# Altium PCB ChongTromSim808.PcbDoc
Units mm, origin at the board's own origin, x right, y up, seen from the top; angles counter-clockwise.
Board outline 152.4 x 101.6 mm, 2 copper layers (Top Layer, Bottom Layer); 29 components, 16 nets, 105 pads, 16 vias.
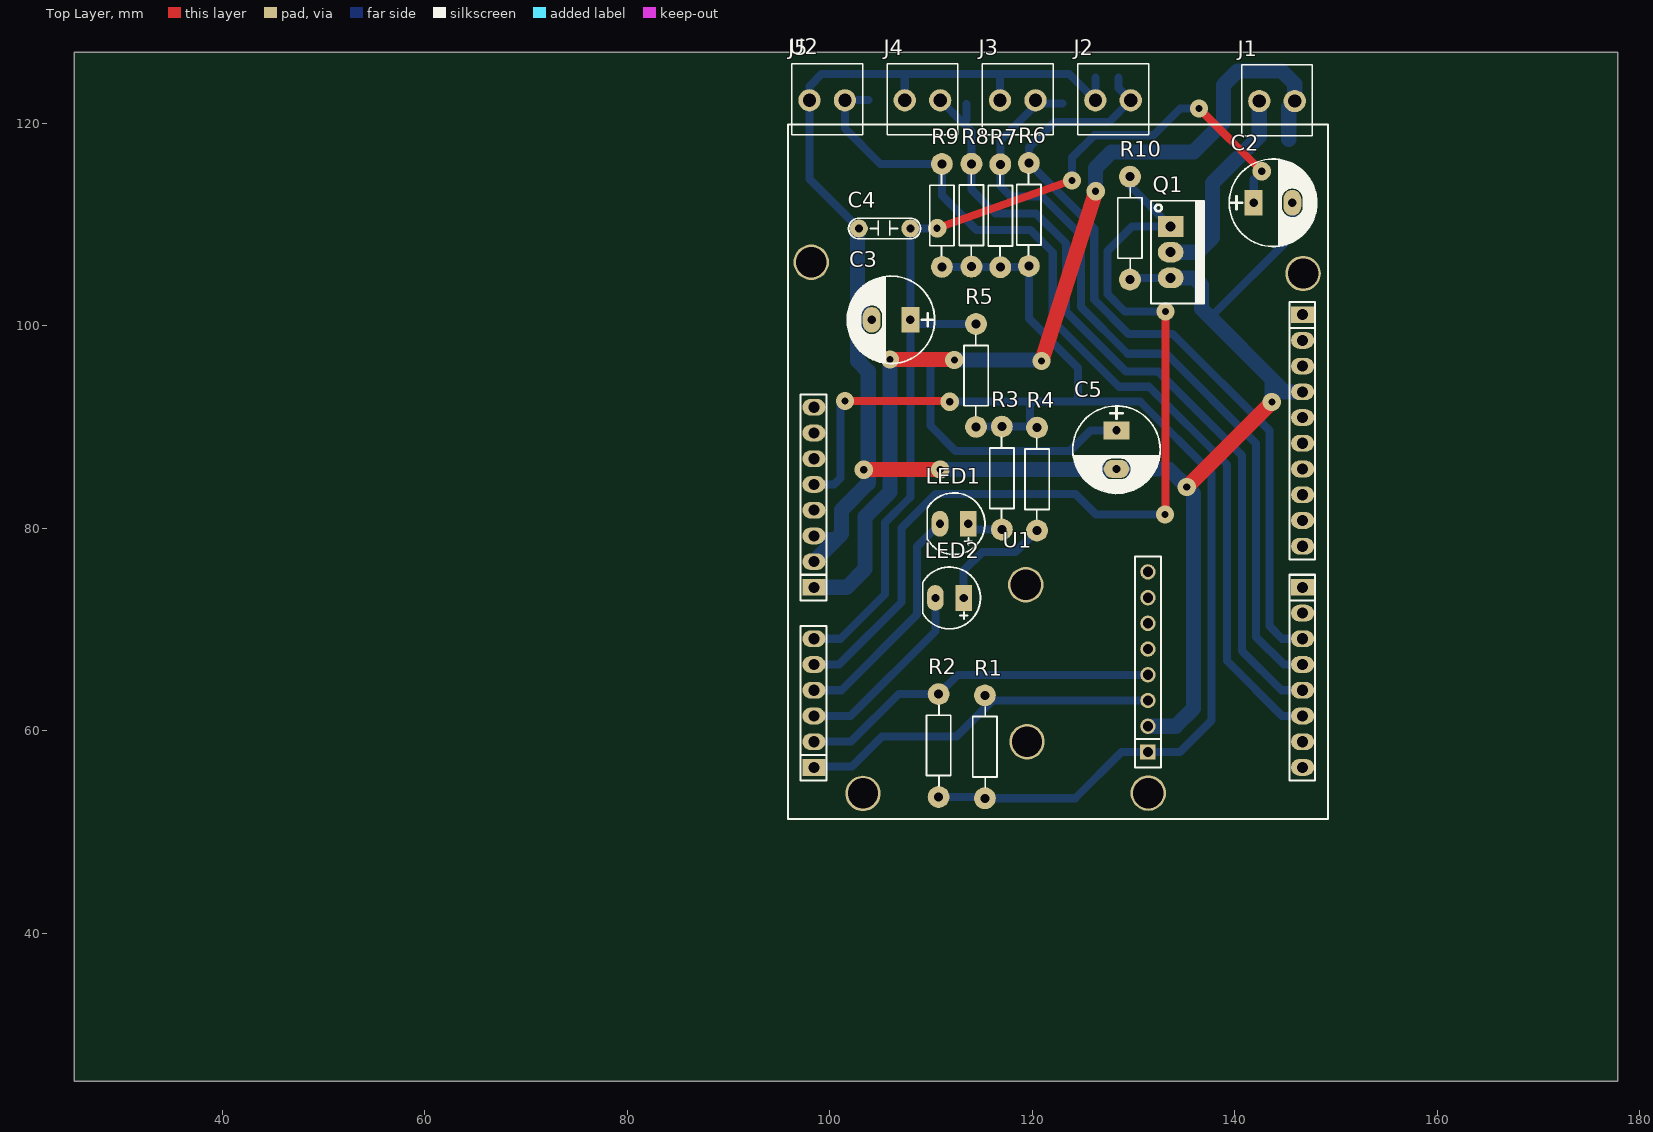
[diagram p0: Top Layer view]
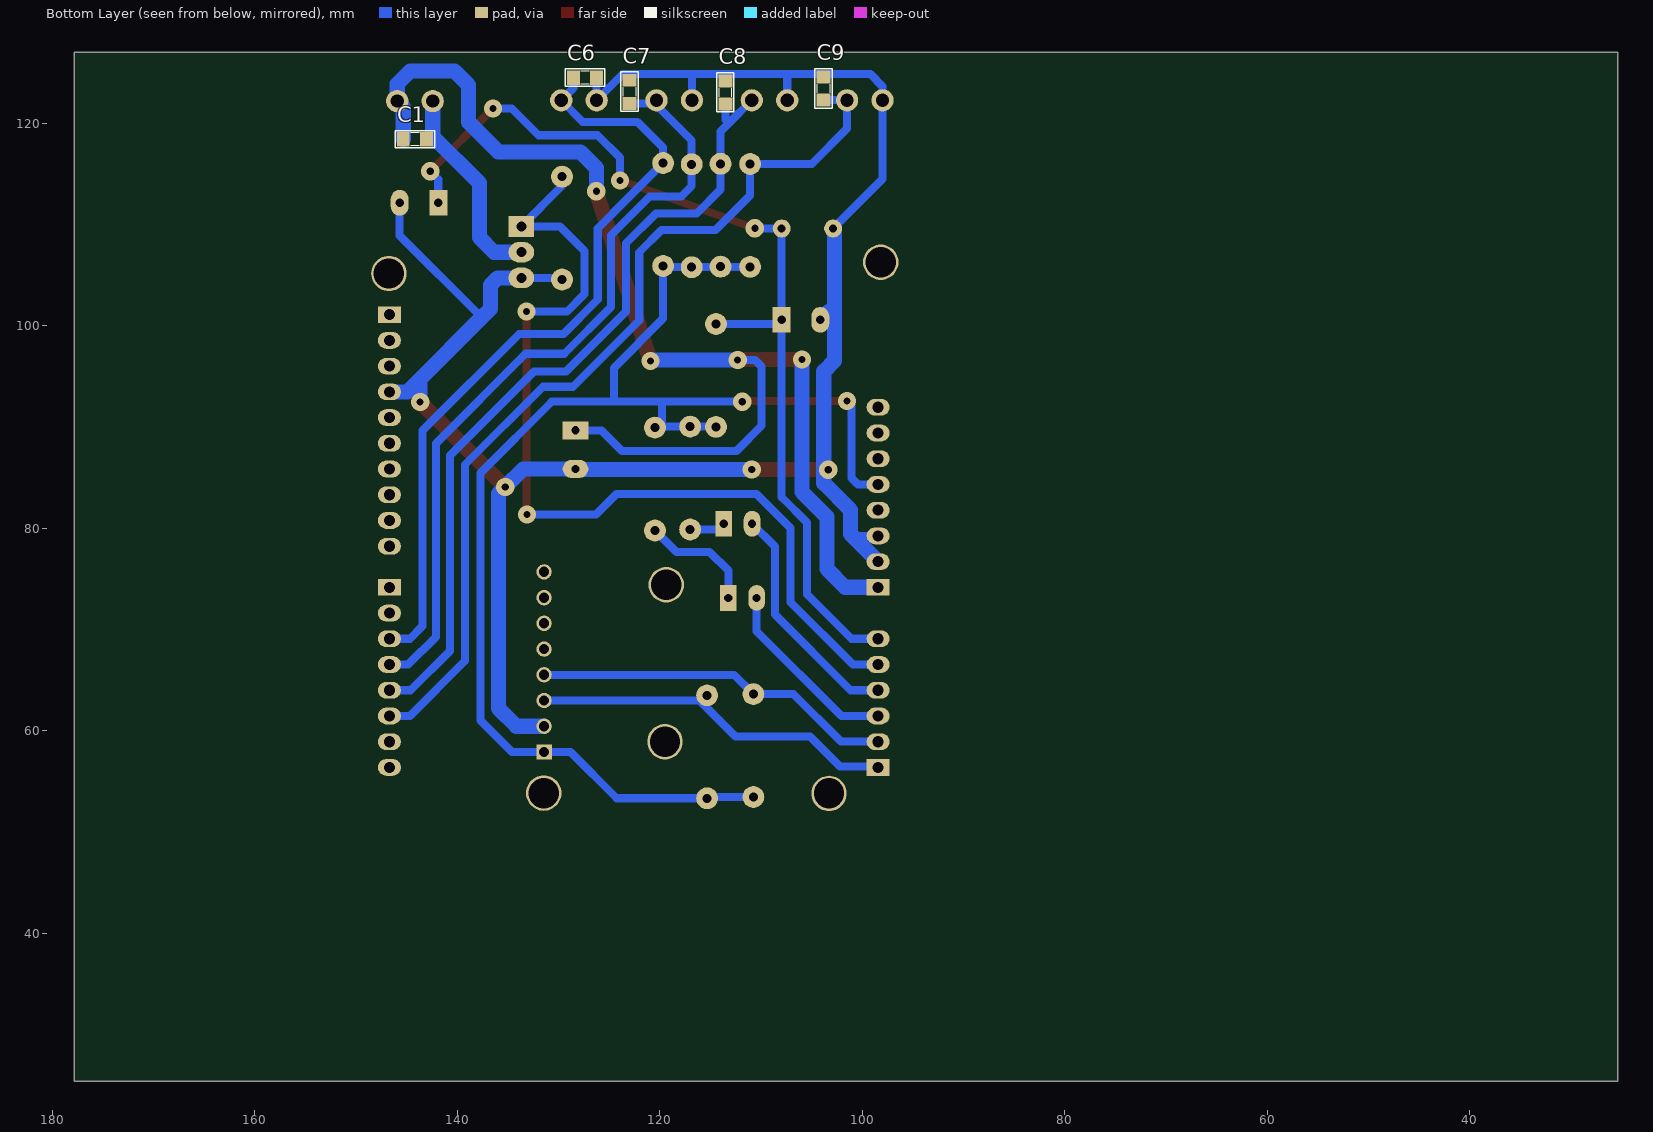
[diagram p1: Bottom Layer view, seen from below]

## Layer stack, top to bottom
Top Solder: solder mask 0.0102, Solder Resist, Dk 3.5
Top Layer: signal copper 0.0356
Dielectric 1: dielectric 0.32, FR-4, Dk 4.8
Bottom Layer: signal copper 0.0356
Bottom Solder: solder mask 0.0102, Solder Resist, Dk 3.5

## Board outline
25.4,25.4 177.8,25.4 177.8,127 25.4,127

## Design rules (kind name [scope] priority, off if disabled: settings)
Clearance [All] p1: gap=0.5 ignorepadtopadclearanceinfootprint=FALSE
PolygonConnect [All] p1: connectstyle=Relief reliefconductorwidth=0.254 reliefentries=4 polygonreliefangle="90 Angle" airgapwidth=0.254
RoutingVias [All] p1: holewidth=0.711 width=1.8 viastyle="Through Hole" minholewidth=0.711 minwidth=1.8 maxholewidth=0.711 maxwidth=1.8
SolderMaskExpansion [All] p1: expansion=0.102
Width [All] p1: maxlimit=1.5 minlimit=0.5 preferedwidth=0.8
30 further rules are at their usual default settings.

## Components (designator, comment, footprint, x,y, rotation, side; value= is the part's Value field where it differs from the comment)
C1 "104" SM-0805 144.17,118.41 r0 bottom value=0.1uF
C2 "Cảm biến rung" CP1.5/3.4 141.86,112.14 r0 top value=100uF/35V/50V
C3 "Cảm biến rung" CP1.5/3.4 107.95,100.584 r180 top value=100uF/35V/50V
C4 "104" CN2 105.41,109.601 r0 top value=0.1uF
C5 "1000uF/16V" CP1.5/3.4 128.31,89.67 r270 top
C6 "103" SM-0805 127.38,124.49 r0 bottom
C7 "103" SM-0805 122.97,123.1 r270 bottom
C8 "103" SM-0805 113.5,123.037 r270 bottom
C9 "103" SM-0805 103.81,123.427 r270 bottom
J1 "KF2" KF2-3.5 144.16,122.18 r180 top
J2 "KF2" KF2-3.5 127.97,122.26 r180 top
J3 "KF2" KF2-3.5 118.56,122.26 r180 top
J4 "KF2" KF2-3.5 109.15,122.26 r180 top
J5 "KF2" KF2-3.5 99.74,122.26 r180 top
LED1 "LED" LED-5-WHITE 112.27,80.45 r180 top
LED2 "LED" LED-5-BLUE 111.823,73.12 r180 top
Q1 "IRFZ44" TO220-123 133.66,109.8 r270 top value=IRF840
R1 "10k" RES-1/4W 115.443,58.801 r90 top
R2 "10k" RES-1/4W 110.871,58.928 r90 top
R3 "1k" RES-1/4W 116.86,84.58 r270 top
R4 "1k" RES-1/4W 120.34,84.48 r270 top
R5 "10k" RES-1/4W 114.31,94.71 r270 top
R6 "10k" RES-1/4W 119.53,110.6 r270 top
R7 "10k" RES-1/4W 116.71,110.48 r270 top
R8 "10k" RES-1/4W 113.861,110.53 r270 top
R9 "10k" RES-1/4W 110.94,110.51 r270 top
R10 "10k" RES-1/4W 129.767,110.021 r90 top
U1 "MPU6050" MPU6050 123.92,63.5 r90 top
U2 "KIT ARDUINO R3" "Arduino UNO R3 - v1" 121.768,83.668 r0 top locked

## Footprints (in the part's own frame and the unit in brackets; to place one, negate y for a bottom-side part, rotate by r counter-clockwise, add the part's x,y. Pads: shape width x height; smd on the part's side, far side on the other; paste and mask are expansions set on the pad)
"Arduino UNO R3 - v1" [mil]
  oval 90x65 hole 43.31: 0-RX(981,-1074) 1-TX(981,-974) 2(981,-874) 3V3(-919,26) 4(981,-674) 5V(-919,-74) 8(981,-214) 12(981,186) 13(981,286) A0(-919,-574) A1(-919,-674) A2(-919,-774) A3(-919,-874) A4(-919,-974) AREF(981,486) GND(-919,-274) GND(-919,-174) GND(981,386) IOREF(-919,226) NC(-919,326) RESET(-919,126) SDA(981,586) ~3(981,-774) ~5(981,-574) ~6(981,-474) ~9(981,-114) ~10(981,-14) ~11(981,86)
  rect 90x65 hole 43.31: 7(981,-374) A5(-919,-1074) SCL(981,686) Vin(-919,-374)
  round 137.8 hole 118.11: GND(-929,890) GND(381,-1174) GND(983,846) ""(-728,-1175)
  oval 90x65 all layers, no hole: ""(-919,876) ""(981,826)
  oval 78.74x0 all layers, no hole: ""(-719,-1174)
  round 0 all layers, no hole: ""(381,-1174)
  silkscreen extent -1020,-1275 1080,1425, body extent -1021,-1298 1085,1668, height 336
CN2 [mil]
  round 70 hole 31: 1(-100,0) 2(100,0)
  silkscreen extent -140,-40 140,40, body extent -154,-49 161,50, height 407
CP1.5/3.4 [mil] "Tu hoa 220->470uF,16V, 470uF/16V,25V"
  rect 70x100 hole 32: 1(0,0)
  oval 70x100 hole 32: 2(150,0)
  silkscreen extent -95,-170 245,170, body extent -85,-157 230,157, height 446
KF2-3.5 [mm] "3,50mm - modular - blue - Horizontal wire entry - Pressure clamp - 8,4mm height - 02p"
  round 2.2 hole 1.3: 1(-1.75,0) 2(1.75,0)
  silkscreen extent -3.5,-3.6 3.5,3.4, body extent -3.95,-3.6 4.05,3.4, height 8.41
LED-5-BLUE [mil] "LED 2 PIN, 5 ly , Only colour, pin to pin 110mil"
  rect 65x100 hole 32: 1(-55,0)
  oval 65x100 hole 32: 2(55,0)
  silkscreen extent -120,-120 104,120, body extent -113,-120 100,117, height 339
LED-5-WHITE [mil] "LED 2 PIN, 5 ly , Only colour, pin to pin 110mil"
  rect 65x100 hole 32: 1(-55,0)
  oval 65x100 hole 32: 2(55,0)
  silkscreen extent -120,-120 104,120, body extent -124,-125 121,120, height 340
MPU6050 [mm]
  rect 1.52x1.52 hole 1.02: 1(-5.588,-7.493)
  round 3.5 hole 3: 2(-4.572,4.445) 2(10.922,4.572)
  round 1.52 hole 1.02: 2(-3.048,-7.493) 3(-0.508,-7.493) 4(2.032,-7.493) 5(4.572,-7.493) 6(7.112,-7.493) 7(9.652,-7.493) 8(12.192,-7.493)
  silkscreen extent -7.11,-8.76 13.71,-6.22, body extent -7.37,-8.76 13.74,7.11, height 14.54
RES-1/4W [mil]
  round 85 hole 35: 1(-215,5) 2(185,5)
  silkscreen extent -173,-42 141,52, body extent -227,-42 197,52, height 95
SM-0805 [mil] "Compoment SMD 80x50mil"
  rect 50x55 smd: 1(-45,0) 2(45,0)
  silkscreen extent -77,-34 76,33, body extent -40,-25 40,25, height 24
TO220-123 [mil] "TO-220 - 1-2-3"
  rect 80x100 hole 39: 1(0,0)
  oval 80x100 hole 39: 2(100,0) 3(200,0)
  silkscreen extent -100,-76 300,130, body extent -95,-80 295,97, height 323

## Part data
C1 C4: library part CN2, "Cap np 104 => 105pF"
C2 C3: library part CP3, "Cap 100uF/35V - 470uF/16V", Description 1="1000uF/6,3V - 470uF/16V - 330uF - 25V", Description 2="220uF/35V - 100uF/50V - 63V - 4,7uF/200V", Description 3="22uF => 33uF100V - 3,3uF => 4,7uF/250V", Description 4="2,2uF =>3,3uF/350 - 2,2uF/400V - 1uF/450V"
C5: library part CP4, "Cap 1000uF/16V - 220uF/50V", Description 1="2200uF-3300uF/6,3V - 1000uF-2200uF/10V", Description 2="1000uF/16V - 470uF => 1000uF/25V - 100uF/100V", Description 3=330uF>470uF/35V_220uF>470uF/50V_10uF>22uF/250V, Description 4="220uF => 330uF/63V - 10uF =>33uF/160 - 200V", Description 5="4,7uF>10uF/250V_3,3uF>10uF/400V - 2,2uF>4,7uF/450V"
C6 C7 C8 C9: library part CM, "Cap SMD"
J1 J2 J3 J4 J5: Manufacturer="Würth Elektronik eiSos GmbH", partNo=691103110002, ComponentLink1 Description=Manufacturer, ComponentLink1URL=http://www.we-online.com, ComponentLink2 Description=Datasheet, ComponentLink2URL=http://katalog.we-online.de/em/datasheet/6911031100xx.pdf, Created by="Karrer Zheng", Created Date="29 October 2013", NoPins=2
R1 R2 R3 R4 R5 R6 R7 R8 R9 R10: library part R, "Resistor R1/4W"
U2: "ARDUINO  R3 ATMEGA328, ARDUINO UNO, EVAL BOARD"

## Via types
v1: diameter 1.8, hole 0.711, Top Layer to Bottom Layer, 16 vias

## Nets (pads, with @x,y where several pads share a name; then routed paths per layer and width w, separated by ;. In a path a pad name is that pad's centre, name@x,y a point inside that pad or via, vN(x,y) a via of type N, cw(c..) or ccw(c..) an arc to the next point about the centre after c; other vN are vias at no path point)
3V3: R1.1 R2.1 R3.1 R4.1 R5.2 R6.2 R7.2 R8.2 R9.2 U1.1 U2.3V3 | length 137.4
  Top Layer w0.8: v1(101.5,92.57) 112,92.57 111.93,92.5 v1(111.85,92.5)
  Bottom Layer w0.8: U2.3V3 100.398,84.328 101.05,84.98 101.05,92.12 v1(101.5,92.57) ; R2.1 115.189,53.467 R1.1 124.24,53.34 128.812,57.912 U1.1 134.582,57.912 137.68,61.01 137.68,85.47 130.65,92.5 124.59,92.5 ; R9.2 119.567,105.811 R6.2 119.657,100.703 124.52,95.84 124.52,92.57 124.59,92.5 ; v1(111.85,92.5) 119.581,92.5 ; R5.2 114.467,90.041 R3.1 R4.1@119.761,90.041 ; R4.1 120.367,90.041 R4.1@119.761,90.041 ; 119.581,92.5 119.761,92.32 R4.1@119.761,90.041 ; 119.581,92.5 124.59,92.5
GND: C2.2 C3.2 C4.1 C5.2 C6.1 C7.1 C8.1 C9.1 J2.2 J3.2 J4.2 J5.2 Q1.3 R10.1 U1.2@131.413,60.452 U2.GND@98.425,76.708 U2.GND@98.425,79.248 U2.GND@146.685,93.472 | length 204
  Top Layer w1.5: v1(103.36,85.77) 103.39,85.8 v1(110.9,85.8) ; v1(135.255,84.075) v1(143.65,92.47)
  Bottom Layer w0.8: U2.GND@98.425,79.248 100.438,79.248 ; C4.1 97.99,114.481 J5.2 97.99,123.64 99.19,124.84 107.42,124.84 ; J4.2 107.4,124.82 107.42,124.84 ; J3.2 116.81,124.78 116.87,124.84 ; C6.1 126.237,122.277 J2.2 123.64,124.84 116.87,124.84 ; R10.1 129.8,104.72 Q1.3 ; 137.77,100.61 137.77,101.01 145.67,108.91 C2.2 ; 107.42,124.84 116.87,124.84
  Bottom Layer w1.5: U2.GND@98.425,76.708 101.16,79.443 101.16,81.82 103.79,84.45 103.79,95.5 102.74,96.55 102.74,109.471 C4.1 ; 103.327,101.397 103.79,100.934 C3.2@103.79,100.584 ; v1(110.9,85.8) 128.25,85.8 C5.2 133.47,85.86 v1(135.255,84.075) 135.9,83.43 135.9,62.2 134.152,60.452 U1.2@131.413,60.452 ; Q1.3 136,104.72 136.7,104.02 136.7,101.68 137.77,100.61 143.685,94.695 ; v1(143.65,92.47) 143.65,94.66 143.685,94.695 ; U2.GND@146.685,93.472 144.908,93.472 143.685,94.695
NetC1_1: C1.1 J1.2 Q1.2 | length 20.1
  Bottom Layer w1.5: Q1.2 136.36,107.26 137.8,108.7 137.8,114.09 142.41,118.7 J1.2
NetC2_1: C2.1 C3.1 C4.2 R5.1 U2.A0 | length 98.4
  Top Layer w0.8: v1(110.6,109.63) v1(123.91,114.35) ; v1(136.45,121.45) v1(142.65,115.25)
  Bottom Layer w0.8: U2.A0 101.048,69.088 105.45,73.49 105.45,80.56 107.95,83.06 C3.1 ; v1(110.6,109.63) C4.2 C3.1 ; R5.1 108.363,100.171 C3.1 ; v1(123.91,114.35) 123.91,116.6 126.12,118.81 131.96,118.81 134.6,121.45 v1(136.45,121.45) ; C2.1 141.86,114.46 v1(142.65,115.25)
NetC6_2: C6.2 J2.1 R6.1 U2.~5 | length 78.2
  Bottom Layer w0.8: C6.2 128.523,123.457 J2.1 127.59,120.13 122.18,120.13 119.657,117.607 R6.1 119.657,116.057 123.164,112.55 123.168,112.55 126.11,109.608 126.11,102.582 129.492,99.2 133.86,99.2 143.4,89.66 143.4,70.35 144.662,69.088 U2.~5
NetC7_2: C7.2 J3.1 R7.1 U2.4 | length 77.5
  Bottom Layer w0.8: C7.2 120.613,121.957 J3.1 120.31,121.77 116.837,118.297 R7.1 116.837,113.783 117.84,112.78 120.96,112.78 124.81,108.93 124.81,101.84 129.42,97.23 133.26,97.23 142.1,88.39 142.1,69.28 144.832,66.548 U2.4
NetC8_2: C8.2 J4.1 R8.1 U2.~3 | length 80.5
  Bottom Layer w0.8: J4.1 113.16,120 ; C8.2 113.5,120.34 113.16,120 ; U2.~3 144.592,64.008 140.7,67.9 140.7,87.18 132.39,95.49 129.23,95.49 123.32,101.4 123.32,108.14 120.37,111.09 116.34,111.09 113.988,113.442 R8.1 113.988,119.173 113.16,120
NetC9_2: C9.2 J5.1 R9.1 U2.2 | length 91.5
  Bottom Layer w0.8: C9.2 101.514,122.284 J5.1 101.49,119.46 104.979,115.971 R9.1 111.067,112.863 114.48,109.45 119.82,109.45 122.02,107.25 122.02,100.51 128.55,93.98 131.53,93.98 139.24,86.27 139.24,66.89 144.662,61.468 U2.2
NetLED1_1: LED1.1 R3.2 | length 3.6
  Bottom Layer w0.8: LED1.1 114.236,79.881 R3.2
NetLED1_2: LED1.2 U2.A2 | length 23.2
  Bottom Layer w0.8: U2.A2 101.138,64.008 108.61,71.48 108.61,78.187 LED1.2
NetLED2_1: LED2.1 R4.2 | length 11.6
  Bottom Layer w0.8: LED2.1 113.22,75.82 115.06,77.66 118.346,77.66 R4.2
NetLED2_2: LED2.2 U2.A3 | length 18.8
  Bottom Layer w0.8: U2.A3 102.058,61.468 110.426,69.836 LED2.2
NetQ1_1: Q1.1 R10.2 U2.A1 | length 91.4
  Top Layer w0.8: v1(133.11,81.36) 133.15,81.4 v1(133.15,101.4)
  Bottom Layer w0.8: U2.A1 100.918,66.548 107.07,72.7 107.07,80.03 110.42,83.38 124.26,83.38 126.28,81.36 v1(133.11,81.36) ; R10.2 129.64,113.82 Q1.1 129.84,109.8 127.41,107.37 127.41,103.12 129.13,101.4 v1(133.15,101.4)
NetR1_2: R1.2 U1.3 U2.A5 | length 35.8
  Bottom Layer w0.8: U2.A5 98.425,56.473 102.193,56.473 105.156,59.436 112.522,59.436 116.078,62.992 U1.3
NetR2_2: R2.2 U1.4 U2.A4 | length 35.7
  Bottom Layer w0.8: U2.A4 102.108,58.928 106.807,63.627 R2.2 112.649,65.532 U1.4
VIN: C1.2 C5.1 J1.1 U2.Vin | length 123.1
  Top Layer w1.5: v1(105.95,96.67) 112.25,96.67 v1(112.3,96.62) ; v1(120.91,96.53) v1(126.25,113.27)
  Bottom Layer w0.8: v1(112.3,96.62) 110.59,96.62 109.94,95.97 109.94,90.13 112.43,87.64 123.71,87.64 125.74,89.67 C5.1
  Bottom Layer w1.5: U2.Vin 101.678,74.168 103.49,75.98 103.49,81.13 105.95,83.59 v1(105.95,96.67) ; v1(112.3,96.62) v1@120.91,96.62 ; v1(126.25,113.27) 126.25,115.58 127.83,117.16 135.93,117.16 138.87,120.1 138.87,123.77 140.26,125.16 144.63,125.16 145.91,123.88 J1.1 145.313,121.583 C1.2
pads on no net: U1.2@119.348,74.422 U1.2@119.475,58.928 U1.5 U1.6 U1.7 U1.8 U2. U2.0-RX U2.1-TX U2.5V U2.7 U2.8 U2.12 U2.13 U2.AREF U2.GND@98.171,106.274 U2.GND@131.445,53.848 U2.GND@146.736,105.156 U2.IOREF U2.NC U2.RESET U2.SCL U2.SDA U2.~6 U2.~9 U2.~10 U2.~11